# Altium PCB UTAT_data handling_v1.pc.PcbDoc (part 3 of 3)
Units mm, origin at the board's own origin, x right, y up, seen from the top; angles counter-clockwise.
Board outline 152.4 x 101.6 mm, 4 copper layers (Top Layer, +3V3, GND, Bottom Layer); 169 components, 207 nets, 755 pads, 446 vias.
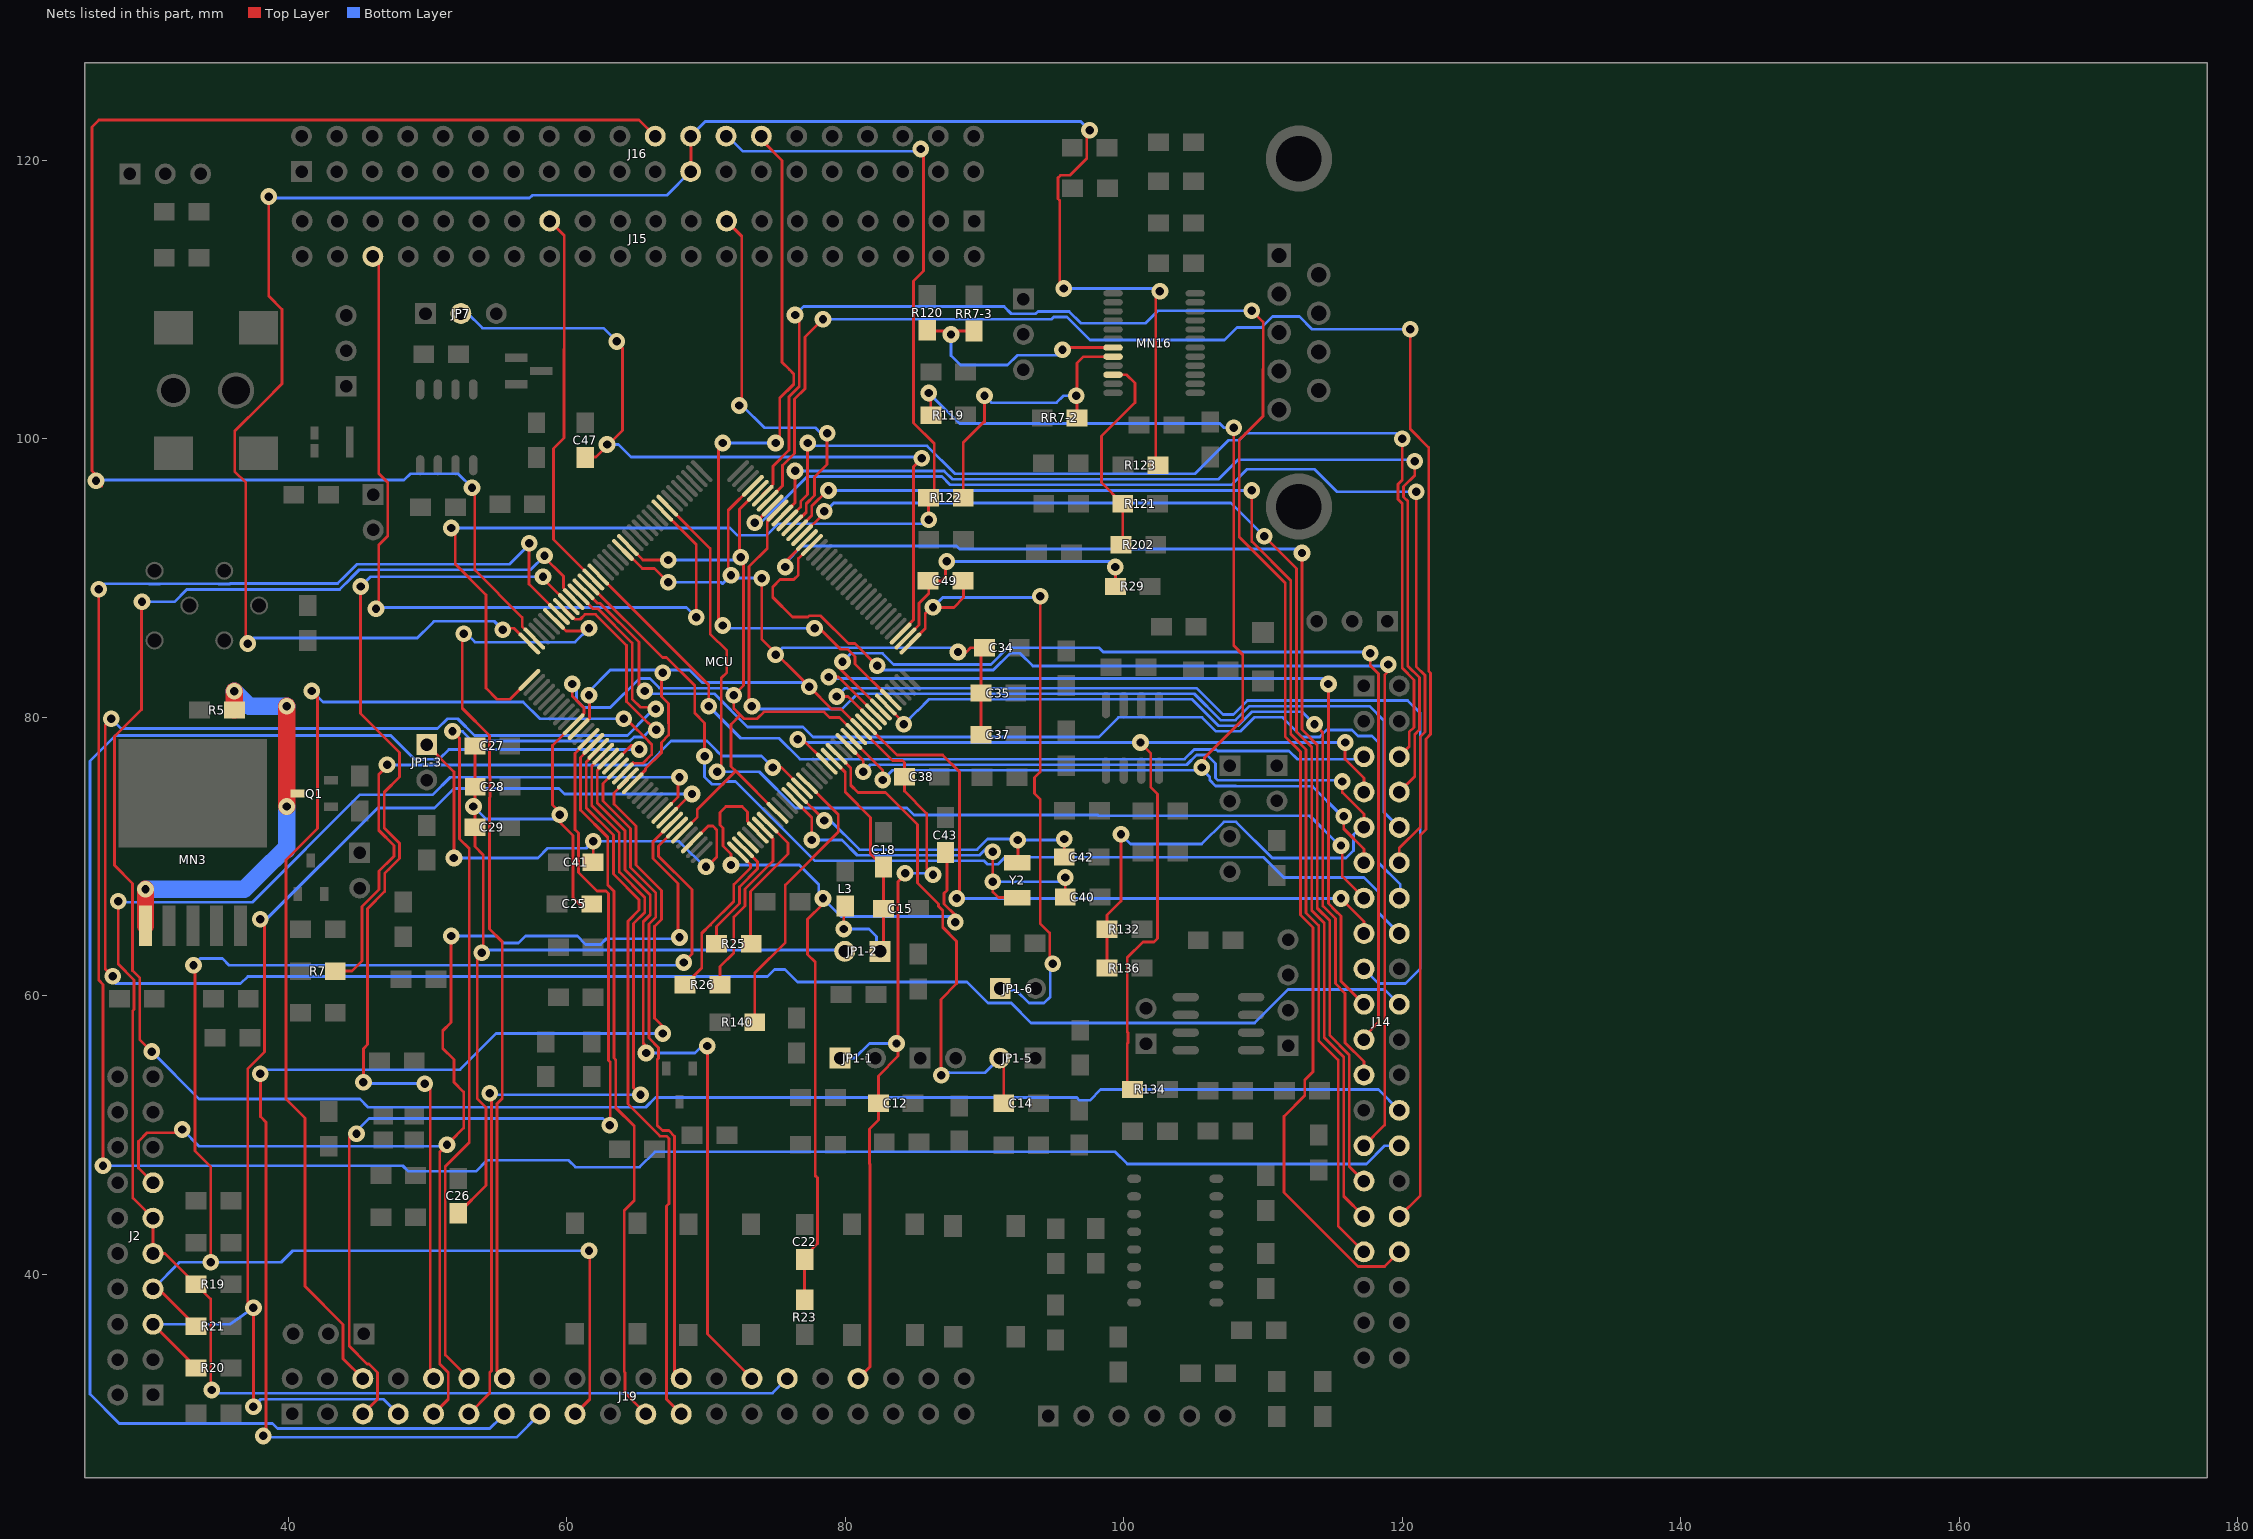
[diagram p5: the nets of this part, all layers, seen from the top]

## Via types
v1: diameter 1.2, hole 0.6, Top Layer to Bottom Layer, 446 vias

## Nets (pads, with @x,y where several pads share a name; then routed paths per layer and width w, separated by ;. In a path a pad name is that pad's centre, name@x,y a point inside that pad or via, vN(x,y) a via of type N, cw(c..) or ccw(c..) an arc to the next point about the centre after c; other vN are vias at no path point) (continued)
PB24: J16.22 MCU.143 | length 107.2
  Top Layer w0.2: v1(26.2,97) 26.2,97.4 25.9,97.7 25.9,122.4 26.4,122.9 65.2,122.9 J16.22@66.36,121.74 J16.22@66.38,121.74 ; v1@26.6,96.6 v1@26.6,97 ; v1@53.4,96.4 53.4,90.573 56.8,87.173 56.8,86.533 MCU.143@57.671,85.662
  Bottom Layer w0.2: v1(26.2,97) 26.25,97.05 48.323,97.05 48.773,97.5 52.2,97.5 v1(53.2,96.5)
PB25: J16.23 J16.24 MCU.144 R123.1 | length 151.8
  Top Layer w0.2: v1(37.1,85.3) 36.956,85.444 36.956,96.856 36.156,97.656 36.156,100.552 38.256,102.652 38.256,102.656 39.556,103.956 39.556,109.304 38.6,110.26 v1(38.6,117.4) ; v1(55.4,86.3) 55.5,86.4 56.226,86.4 MCU.144@57.317,85.308 ; J16.23@68.92,119.2 J16.24@68.92,121.74 ; v1(95.7,110.8) 95.4,111.1 95.4,117.132 95.281,117.251 95.281,118.749 95.457,118.925 96.124,118.925 97.35,120.151 97.35,121.649 97.174,121.825 97.174,122.074 v1@97.6,122.5 ; R123.1@102.381,98.23 102.3,98.311 102.3,110.3 v1(102.6,110.6)
  Bottom Layer w0.2: v1(37.1,85.3) 37.5,85.7 49.27,85.7 50.285,86.715 ; v1(38.6,117.4) 38.7,117.3 57.334,117.3 57.534,117.5 67.2,117.5 J16.23@68.9,119.2 ; 50.286,86.714 50.473,86.9 54.8,86.9 v1(55.4,86.3) ; J16.24@68.9,121.74 69.95,122.79 96.916,122.79 v1(97.55,122.156) ; J16.23@68.91,119.19 J16.23@68.92,119.2 ; v1(95.7,110.8) 102.4,110.8 v1(102.6,110.6)
PB26: J16.26 MCU.1 R122.1 | length 93.5
  Top Layer w0.2: v1(51.7,93.6) 52,93.3 52,91 54.2,88.8 54.2,82.1 55,81.3 55.926,81.3 MCU.1@57.317,82.692 ; v1@85.63,120.818 85.63,112.064 84.9,111.334 84.9,101.151 86.4,99.651 86.4,96.198 R122.1@85.978,95.776 v1@85.978,94.422
  Bottom Layer w0.2: v1(51.7,93.6) 71.727,93.6 72.252,93.075 74.348,93.075 75.173,93.9 85.7,93.9 v1(86,94.2) ; J16.26@71.46,121.74 71.56,121.74 72.65,120.65 85.262,120.65 v1(85.43,120.818)
PB27: J16.28 MCU.68 | length 55.5
  Top Layer w0.2: v1(71.2,86.6) 70.9,86.9 70.9,99.4 v1(71.2,99.7) ; J16.28@74.151,121.32 75.47,120.001 75.47,105.5 75.473,105.5 76,104.973 ; v1(75,99.7) 75.2,99.7 75.3,99.8 75.3,102.927 76.3,103.927 76.3,104.673 76,104.972 ; v1(77.8,86.4) 77.8,86.346 77.946,86.2 78.146,86.4 79.646,84.9 80.173,84.9 80.7,84.373 80.7,83.846 MCU.68@83.268,81.278
  Bottom Layer w0.2: v1(71.2,86.6) 71.4,86.4 v1(77.8,86.4) ; v1(71.2,99.7) 71,99.7 v1(75,99.7)
PB28: J2.9 J2.11 J19.30 MCU.28 R19.1 | length 127
  Top Layer w0.2: v1(27.8,66.8) 27.8,62.273 28.931,61.142 28.931,59.031 28.84,58.94 28.84,45.49 J2.11@30.29,44.04 J2.9@30.29,41.5 31.161,41.5 R19.1@33.381,39.28 34.431,38.23 34.431,31.769 v1(34.5,31.7) ; MCU.28@66.863,73.146 68,74.282 68,75.6 v1(68.1,75.7)
  Bottom Layer w0.2: v1@28.226,66.726 37.434,66.726 45.158,74.45 50.385,74.45 51.635,75.7 v1(68.1,75.7) ; v1(34.5,31.7) 34.73,31.47 74.791,31.47 J19.30@75.841,32.52
PB29: J2.5 J19.7 MCU.29 R20.1 | length 95.6
  Top Layer w0.2: J2.5@30.29,36.42 33.381,33.329 R20.1@33.381,33.28 ; v1@37.1,38 37.1,54.773 38.3,55.973 38.3,65.2 v1(38,65.5) ; v1(37.5,30.5) v1(37.5,37.6) ; MCU.29@67.217,72.792 v1@68.825,74.4
  Bottom Layer w0.2: J2.5@30.29,36.42 35.82,36.42 v1(37.5,37.6) ; v1(37.5,30.5) 38.03,31.03 46.851,31.03 J19.7@47.901,29.98 ; v1(38,65.5) 38.427,65.5 46.427,73.5 50.5,73.5 51.9,74.9 59.438,74.9 59.838,74.5 v1(69,74.5)
PB30: J2.13 J19.9 MCU.30 | length 89.9
  Top Layer w0.2: J2.13@30.29,46.58 29.24,47.63 29.24,49.555 29.855,50.17 32.17,50.17 v1(32.4,50.4) ; J19.9@50.441,29.98 51.491,31.03 51.491,32.955 50.884,33.562 50.884,48.784 51.7,49.6 52.6,50.5 52.6,53.1 51.9,53.8 51.9,55.427 51.1,56.227 51.1,57.5 51.7,58.1 v1(51.7,64.3) ; MCU.30@67.571,72.439 66.2,71.068 66.2,69.865 68,68.065 68,64.3 v1(68.1,64.2)
  Bottom Layer w0.2: v1(32.4,50.4) 33.6,49.2 51.3,49.2 v1(51.4,49.3) ; v1(51.7,64.3) 54.962,64.3 55.462,63.8 56.538,63.8 57.038,64.3 60.762,64.3 61.362,63.7 62.438,63.7 62.838,64.1 68,64.1 v1(68.1,64.2)
PB31: J2.7 J19.17 MCU.31 R21.1 | length 118.8
  Top Layer w0.2: J2.7@30.29,38.96 30.701,38.96 R21.1@33.381,36.28 ; v1(33.2,62.2) 33.3,62.1 33.3,48.866 34.431,47.735 v1(34.431,40.869) ; J19.17@60.601,29.98 61.651,31.03 61.651,41.649 v1(61.6,41.7) ; MCU.31@67.924,72.085 66.6,70.761 66.6,70.031 69,67.631 69,63 v1(68.4,62.4)
  Bottom Layer w0.2: J2.7@30.29,38.96 32.199,40.869 v1(34.431,40.869) 39.496,40.869 40.327,41.7 v1(61.6,41.7) ; v1(33.2,62.2) 33.68,62.68 35.279,62.68 35.759,62.2 68.7,62.2 68.9,62.4 v1(68.4,62.4)
PC0: J14.5 MCU.130 | length 62.7
  Top Layer w0.2: MCU.130@62.267,90.258 70.2,82.325 v1(70.2,80.8)
  Bottom Layer w0.2: v1(70.2,80.8) 72.5,78.5 75.245,78.5 76.745,77 104.362,77 105.062,77.7 106.637,77.7 106.757,77.58 110.116,77.58 110.126,77.59 111.874,77.59 112.464,77 117.07,77 J14.5@117.25,77.18 J14.5@116.801,77.629
PC1: J14.7 MCU.55 R134.1 | length 73.6
  Top Layer w0.2: v1(76.6,78.418) 76.6,78.446 76.754,78.6 MCU.55@78.672,76.681 ; R134.1@100.631,53.28 100.25,53.661 100.25,56.577 100.3,56.627 100.3,57.373 100.25,57.423 100.25,62.749 101.376,63.875 102.174,63.875 102.431,64.132 102.431,74.503 101.936,74.998 101.936,77.43 v1@101.1,78.266 ; v1(115.9,78.2) 115.9,77 117.25,75.65 J14.7@117.25,74.64
  Bottom Layer w0.2: v1(76.6,78.418) 76.6,78.3 76.7,78.2 v1(115.9,78.2)
  other v1: 101.2,78.2
PC2: J14.9 MCU.59 R132.1 R136.2 | length 73.8
  Top Layer w0.2: MCU.59@80.086,78.096 81.3,76.882 v1(81.3,76.1) ; R136.2@98.8,62 R132.1@98.8,64.8 98.8,65.801 99.8,66.801 v1(99.8,71.6) ; v1(115.7,75.4) 115.7,74.6 117.25,73.05 J14.9@117.25,72.1
  Bottom Layer w0.2: v1(81.3,76.1) 81.8,76.6 104.527,76.6 105.227,77.3 105.973,77.3 106.581,76.692 106.581,75.656 106.757,75.48 115.62,75.48 v1(115.7,75.4) ; v1(99.8,71.6) 100.5,70.9 105.596,70.9 107.196,72.5 108.066,72.5 110.666,69.9 115.973,69.9 116.5,70.427 116.5,71.6 117,72.1 J14.9@117.25,72.1
PC3: J14.11 MCU.60 R119.1 | length 92.7
  Top Layer w0.2: MCU.60@80.511,78.449 MCU.60@80.44,78.449 82.7,76.189 v1(82.7,75.5) ; v1(86,103.3) 86,102.8 86.15,102.65 R119.1@86.15,101.7 ; v1@105.8,76.7 105.8,77.1 108.55,79.85 108.55,84.499 107.9,85.149 v1(107.9,100.8) ; v1(115.8,72.9) 115.8,72 117.25,70.55 J14.11@117.25,69.56
  Bottom Layer w0.2: v1(82.7,75.5) 83.4,76.2 105.7,76.2 106.181,75.719 106.181,75.49 106.591,75.08 108.046,75.08 108.076,75.05 113.549,75.05 v1@115.659,72.94 ; v1(86,103.3) 88.2,101.1 106.893,101.1 107.193,100.8 v1(107.9,100.8)
  other v1: 105.6,76.4
PC4: J14.13 MCU.116 | length 72.9
  Top Layer w0.2: MCU.116@67.217,95.208 70.3,92.125 70.3,86 71.5,84.8 71.5,83.227 71.1,82.827 71.1,76.4 v1(70.8,76.1) ; v1@70.6,76 70.6,76.027 v1@70.736,76.163 ; v1(115.6,70.8) 115.7,70.7 115.7,68.57 J14.13@117.25,67.02
  Bottom Layer w0.2: v1(70.8,76.1) 73.827,76.1 76.427,73.5 84.439,73.5 84.938,73 98.14,73 98.2,72.94 113.36,72.94 115.5,70.8 v1(115.6,70.8)
PC5: J14.15 MCU.63 | length 48.1
  Top Layer w0.2: MCU.63@81.501,79.51 83.71,77.3 86.999,77.3 88.2,76.099 88.2,67.2 v1(88,67) ; v1(115.6,67) 117.25,65.35 J14.15@117.25,64.48
  Bottom Layer w0.2: v1(88,67) v1(115.6,67)
PC6: J14.17 MCU.64 | length 70.1
  Top Layer w0.2: v1(79.4,81.5) 80.2,81.5 80.209,81.509 MCU.64@81.854,79.863
  Bottom Layer w0.2: v1(79.4,81.5) 80,82.1 105.227,82.1 107.127,80.2 107.873,80.2 108.877,81.204 113.115,81.204 113.121,81.21 120.39,81.21 121.3,80.3 121.3,61.965 120.225,60.89 118.3,60.89 J14.17@117.25,61.94
PC7: J14.19 MCU.65 | length 64.8
  Top Layer w0.2: v1(78.827,82.9) 79.524,82.9 ; 79.525,82.9 MCU.65@82.208,80.217 ; 114.7,71.173 114.7,66.627 115.227,66.1 ; 114.7,71.173 v1(114.7,82.4) ; 115.228,66.1 115.6,65.728 115.6,61.05 J14.19@117.25,59.4
  Bottom Layer w0.2: v1(78.827,82.9) 78.927,82.8 114.3,82.8 114.6,82.5 v1@114.9,82.5
PC8: J14.21 MCU.66 | length 71.9
  Top Layer w0.2: v1@79.466,83.666 MCU.66@82.561,80.571 ; J14.21@117.25,56.86 117.25,57.06 118.3,58.11 118.3,83.134 117.7,83.734 v1(117.7,84.6)
  Bottom Layer w0.2: v1(79.8,84) 80.4,84.6 82.673,84.6 83.473,83.8 90.462,83.8 91.662,85 98.227,85 98.527,84.7 117.6,84.7 v1(117.7,84.6)
PC9: J14.23 MCU.67 | length 60.4
  Top Layer w0.2: MCU.67@82.915,80.924 v1@84.269,79.569 ; v1(113.7,79.5) 114.3,78.9 114.3,71.339 114.3,66.462 115.062,65.7 ; 115.063,65.7 115.2,65.563 115.2,60.884 115.9,60.184 115.9,56.631 117.25,55.281 J14.23@117.25,54.32
  Bottom Layer w0.2: v1(84.2,79.5) 85.2,80.5 85.227,80.5 86.027,81.3 104.896,81.3 106.796,79.4 108.204,79.4 109.208,80.404 112.796,80.404 v1(113.7,79.5)
PC10: J15.36 MCU.117 | length 58
  Top Layer w0.2: J15.36@46.08,113.024 46.5,112.604 46.5,97.524 47.15,96.874 47.15,93.025 46.5,92.375 46.5,88 v1(46.3,87.8) ; MCU.117@66.863,94.854 69.3,92.418 v1(69.3,87.2)
  Bottom Layer w0.2: v1(46.3,87.8) 46.4,87.9 57.1,87.9 68.6,87.9 v1(69.3,87.2)
PC11: J14.27 MCU.93 | length 87.8
  Top Layer w0.2: MCU.93@77.611,92.379 76.632,91.4 76.632,90.232 76.3,89.9 75.327,89.9 74.8,89.373 74.8,88.627 76.227,87.2 77.327,87.2 77.427,87.3 78.227,87.3 80.227,85.3 80.7,85.3 v1(82.3,83.7) ; J14.27@117.25,49.24 118.74,50.73 118.74,83.04 v1@119.1,83.4
  Bottom Layer w0.2: v1(82.3,83.7) 82.6,83.4 90.627,83.4 91.827,84.6 92.573,84.6 93.473,83.7 118.9,83.7 v1(119,83.8)
PC12: J14.29 MCU.94 | length 87.6
  Top Layer w0.2: v1(75.7,90.8) 75.7,91.175 MCU.94@77.258,92.733 ; v1@112.8,92.1 v1(112.8,91.8) 112.8,79.127 113.9,78.027 113.9,71.504 ; 113.9,71.504 113.9,66.296 114.8,65.396 114.8,57.166 116.2,55.766 116.2,47.75 J14.29@117.25,46.7
  Bottom Layer w0.2: v1@75.7,91.1 76.9,92.3 88,92.3 88.2,92.1 112.5,92.1 v1(112.8,91.8)
PC13: J14.31 MCU.95 | length 87
  Top Layer w0.2: MCU.95@76.904,93.086 78.5,94.682 v1(78.5,94.8) ; v1(110.1,93) 112.4,90.7 112.4,78.962 113.5,77.862 113.5,71.67 113.5,66.13 114.4,65.23 114.4,57 115.8,55.6 115.8,45.61 J14.31@117.25,44.16
  Bottom Layer w0.2: v1(78.5,94.8) 78.573,94.8 79.173,95.4 107.7,95.4 v1(110.1,93)
PC14: J14.33 MCU.96 | length 92.2
  Top Layer w0.2: MCU.96@76.551,93.44 77.6,94.489 77.6,95.173 78.727,96.3 v1(78.8,96.3) ; v1(109.2,96.3) 109.2,92.627 111.993,89.835 111.993,78.803 113.1,77.696 113.1,71.836 113.1,65.965 114,65.064 114,56.8 115.4,55.4 115.4,43.47 J14.33@117.25,41.62
  Bottom Layer w0.2: v1(78.8,96.3) v1(109.2,96.3)
PC15: J15.15 MCU.97 | length 28.6
  Top Layer w0.2: J15.15@71.48,115.64 72.57,114.55 72.57,102.57 v1(72.4,102.4) ; MCU.97@76.197,93.793 76.259,93.793 77.2,94.734 77.2,95.338 77.8,95.938 77.8,97.273 78.7,98.173 v1(78.7,100.4)
  Bottom Layer w0.2: v1(72.4,102.4) 72.6,102.4 74.2,100.8 77.873,100.8 78.273,100.4 v1(78.7,100.4)
PC16: J14.6 MCU.98 | length 75.1
  Top Layer w0.2: MCU.98@75.844,94.218 MCU.98@75.844,94.147 76.8,95.103 76.8,95.504 77.3,96.004 v1(77.3,99.7) ; J14.6@119.79,77.18 120.5,77.89 120.5,78.945 120.84,79.285 120.84,82.695 120,83.535 120,95.362 119.7,95.662 119.7,96.738 120,97.038 120,97.066 v1(120,100)
  Bottom Layer w0.2: v1(77.3,99.7) 77.5,99.5 79.073,99.5 85.873,99.5 87.873,97.5 105.127,97.5 107.527,99.9 108.273,99.9 108.773,100.4 119.6,100.4 v1(120,100)
PC17: J14.8 MCU.99 | length 74.3
  Top Layer w0.2: MCU.99@75.49,94.501 76.4,95.41 v1(76.4,97.7) ; J14.8@119.79,74.64 120.9,75.75 120.9,78.779 121.24,79.119 121.24,82.861 120.4,83.701 120.4,95.527 120.1,95.827 120.1,96.573 120.9,97.373 v1(120.9,98.4)
  Bottom Layer w0.2: v1(76.4,97.7) 87.107,97.7 87.707,97.1 106.8,97.1 108.2,98.5 120.64,98.5 120.9,98.24 v1(120.9,98.4)
PC18: J14.10 MCU.100 | length 70.7
  Top Layer w0.2: v1(73.3,80.8) 73.1,81 73.1,90.373 73.1,90.827 74.404,92.131 74.404,94.051 75.137,94.783 MCU.100@75.137,94.854
  Bottom Layer w0.2: v1(73.3,80.8) 73.5,80.6 79.773,80.6 80.873,81.7 105.062,81.7 106.962,79.8 108.038,79.8 109.042,80.804 117.651,80.804 118.7,79.755 118.7,73.19 J14.10@119.79,72.1
PC19: J14.12 MCU.101 | length 80.1
  Top Layer w0.2: v1(73.504,93.975) 73.504,93.928 MCU.101@74.783,95.208 ; J14.12@119.79,69.56 119.79,70.615 121.3,72.125 121.3,78.614 121.64,78.954 121.64,83.026 121,83.666 v1(121,96.2)
  Bottom Layer w0.2: v1@73.3,93.7 73.673,93.7 77.273,97.3 86.941,97.3 87.541,96.7 107.727,96.7 108.847,97.82 113.69,97.82 115.31,96.2 v1(121,96.2)
PC20: J15.25 MCU.131 | length 27.8
  Top Layer w0.2: J15.25@58.78,115.64 59.83,114.59 59.83,106.468 59.8,106.438 59.8,100.055 59.05,99.305 59.05,92.768 MCU.131@61.914,89.904 MCU.131@61.914,89.834
PC21: J14.16 MCU.132 | length 73.5
  Top Layer w0.2: MCU.132@61.56,89.551 61.619,89.551 66.87,84.3 67.173,84.3 69.2,82.273 69.2,80.3 69.9,79.6 v1(69.9,77.2)
  Bottom Layer w0.2: v1(69.9,77.2) 69.9,75.727 70.427,75.2 71.18,75.2 71.38,75.4 72.127,75.4 77.827,69.7 89.986,69.7 90.229,69.456 90.975,69.456 91.478,69.96 110.04,69.96 111.49,68.51 117.245,68.51 118.3,67.455 118.3,65.97 J14.16@119.79,64.48
PC22: J14.14 MCU.133 | length 77.7
  Top Layer w0.2: MCU.133@61.207,89.197 62.204,88.2 62.404,88.2 65.2,85.404 65.2,82.3 v1(65.6,81.9)
  Bottom Layer w0.2: v1(65.6,81.9) 65.8,81.7 69.827,81.7 70.6,81.7 72.982,79.318 76.973,79.318 77.691,78.6 98.219,78.6 99.623,80.004 105.626,80.004 106.63,79 108.37,79 109.374,80.004 111.396,80.004 112.8,78.6 114.073,78.6 114.573,79.1 116.385,79.1 116.815,78.67 117.83,78.67 118.3,78.2 118.3,69.565 119.865,68 119.865,67.095 J14.14@119.79,67.02
PC23: J14.20 MCU.134 | length 165.9
  Top Layer w0.2: v1(27.3,79.9) 26.865,79.465 26.865,61.935 v1(27.4,61.4) ; MCU.134@60.853,88.844 61.897,87.8 62.238,87.8 64.7,85.338 64.7,81.327 65.3,80.727 v1@66.173,80.727
  Bottom Layer w0.2: v1(27.3,79.9) 28,79.2 50.727,79.2 51.427,79.9 52.173,79.9 53.373,78.7 64.361,78.7 65.894,80.233 ; v1@27.62,60.88 36.58,60.88 37.1,61.4 74.427,61.4 74.927,61.9 75.673,61.9 76.573,61 88.737,61 90.257,59.48 91.92,59.48 93.35,58.05 109.405,58.05 111.805,60.45 118.74,60.45 J14.20@119.79,59.4
  other v1: 66.4,80.6
PC24: J14.26 MCU.135 | length 161.2
  Top Layer w0.2: v1(29.5,88.3) 29.456,88.256 29.456,80.556 27.522,78.622 27.522,69.378 28.827,68.073 28.827,61.811 29.331,61.307 29.331,56.869 v1(30.2,56) ; v1(58.4,91.6) 58.3,91.6 59.767,90.133 59.767,89.294 60.499,88.561 MCU.135@60.499,88.49
  Bottom Layer w0.2: v1(29.5,88.3) 31.832,88.3 32.712,89.18 43.694,89.18 44.495,89.981 44.495,89.995 45.1,90.6 56.424,90.6 57.4,90.6 v1(58.4,91.6) ; v1(30.2,56) 33.6,52.6 45.141,52.6 45.741,52 63.638,52 65.673,52 66.373,52.7 66.727,52.7 68.373,52.7 96.627,52.7 96.827,52.5 97.573,52.5 98.343,53.27 118.3,53.27 J14.26@119.79,51.78
PC25: J19.10 MCU.136 | length 80.9
  Top Layer w0.2: v1(45.2,89.4) 45.2,80.273 48,77.473 48,75.727 46.9,74.627 46.9,72.061 48,70.961 48,69.861 47.238,69.1 47.225,69.1 46.925,68.8 46.925,67.483 45.7,66.258 45.7,56.501 45.4,56.201 v1(45.4,53.8) ; v1(49.8,53.7) 49.875,53.7 50.2,53.375 50.2,32.52 J19.10@50.441,32.52 ; v1@58.2,89.8 58.3,89.7 58.582,89.7 MCU.136@60.146,88.137
  Bottom Layer w0.2: v1(45.2,89.4) 45.9,90.1 v1(58.3,90.1) ; v1(45.4,53.8) 45.5,53.7 v1(49.8,53.7)
PC26: J19.12 MCU.137 | length 76.9
  Top Layer w0.2: v1(51.8,79) 52.3,78.5 52.3,71.273 53,70.573 53,49.478 51.284,47.762 51.284,34.217 J19.12@52.981,32.52 ; MCU.137@59.792,87.783 59.863,87.783 60.596,87.05 60.969,87.05 61.319,87.4 62.072,87.4 64.3,85.173 64.3,81.127 65.827,79.6 65.861,79.6 v1@66.661,78.8 ; v1@66.423,79.038 v1(66.423,79.1)
  Bottom Layer w0.2: v1(51.8,79) 52.507,79 53.207,78.3 64.527,78.3 64.827,78.6 65.493,78.6 65.993,79.1 v1(66.423,79.1)
PC27: J14.28 MCU.138 | length 175.6
  Top Layer w0.2: v1@26.2,89.4 v1(26.4,89.2) 26.4,80.373 26.4,61.127 26.7,60.827 v1(26.7,47.8) ; v1(57.3,92.5) 57.3,89.568 MCU.138@59.439,87.429
  Bottom Layer w0.2: v1@26.34,47.9 v1@26.7,47.9 ; v1(26.4,89.2) 26.8,89.6 29.993,89.6 30.013,89.58 30.8,89.58 30.82,89.6 34.993,89.6 35.013,89.58 35.8,89.58 35.825,89.605 43.553,89.605 44.095,90.147 44.095,90.161 44.934,91 55.9,91 57.3,92.4 v1(57.3,92.5) ; v1(26.7,47.8) 48.227,47.8 48.627,47.4 53.473,47.4 54.273,48.2 60.127,48.2 60.627,47.7 65.227,47.7 66.327,48.8 99.389,48.8 100.258,47.931 117.426,47.931 118.735,49.24 J14.28@119.79,49.24
PC28: J19.14 MCU.139 | length 67.7
  Top Layer w0.2: v1(52.6,86) 52.5,85.9 52.5,80.659 54.463,78.696 54.463,75.795 54.483,75.775 54.483,74.277 54.463,74.257 54.463,64.799 55.371,63.891 55.371,52.627 55,52.256 55,33.041 J19.14@55.521,32.52 ; MCU.139@59.085,87.076 59.961,86.2 61.4,86.2 v1(61.6,86.4)
  Bottom Layer w0.2: v1(52.6,86) 52.8,86 53.4,85.4 60.6,85.4 v1(61.6,86.4)
PC29: J14.32 MCU.102 | length 123.9
  Top Layer w0.2: MCU.102@74.429,95.561 75.5,96.632 75.5,98.1 76.361,98.961 76.361,102.857 77.104,103.6 77.104,107.304 v1(78.4,108.6) ; J14.32@119.79,44.16 121.3,45.67 121.3,71.559 121.7,71.959 121.7,78.448 122.04,78.788 122.04,83.192 121.9,83.332 121.9,99.373 120.575,100.698 v1(120.575,107.875)
  Bottom Layer w0.2: v1(78.4,108.6) 78.41,108.59 94.809,108.59 94.974,108.755 95.918,108.755 97.573,107.1 107.227,107.1 108.127,108 109.906,108 110.686,108.78 112.621,108.78 113.526,107.875 v1(120.575,107.875)
PC30: J14.34 MCU.103 | length 126.6
  Top Layer w0.2: MCU.103@74.076,95.915 74.076,95.985 74.809,96.718 74.809,98.036 75.961,99.188 75.961,103.023 76.7,103.761 76.7,108.6 v1(76.4,108.9) ; v1(109.2,109.2) 110.015,108.385 110.015,105.015 110,105 110,101.627 108.3,99.927 108.3,92.962 111.593,89.669 111.593,78.638 112.7,77.53 112.7,72.001 112.7,65.799 113.6,64.899 113.6,54.549 113,53.949 113,52.851 111.5,51.351 111.5,45.885 116.815,40.57 118.74,40.57 J14.34@119.79,41.62
  Bottom Layer w0.2: v1(76.4,108.9) 77,109.5 91.416,109.5 91.926,108.99 93.674,108.99 93.839,109.155 96.083,109.155 96.938,108.3 101.573,108.3 102.473,109.2 v1(109.2,109.2)
PD0: J19.5 MCU.13 | length 70.4
  Top Layer w0.2: v1(44.9,50.1) 44.7,50.1 44.381,49.781 44.381,34.856 45.667,33.57 45.796,33.57 46.411,32.955 46.411,31.03 J19.5@45.361,29.98 ; MCU.13@61.56,78.449 61.56,78.378 60.6,77.418 60.6,71.938 60.85,71.688 60.85,68.851 62.176,67.525 62.824,67.525 63,67.349 63,55.365 63.125,55.24 63.125,50.725 v1(63.1,50.7)
  Bottom Layer w0.2: v1(44.9,50.1) 44.9,50.3 45.8,51.2 62.6,51.2 v1(63.1,50.7)
PD1: J19.21 MCU.14 | length 51
  Top Layer w0.2: MCU.14@61.914,78.096 61.914,78.025 61,77.111 61,73.338 62.95,71.388 62.95,67.965 63.4,67.515 63.4,55.531 63.525,55.406 63.525,51.971 64.85,50.646 64.85,45.298 64.131,44.579 64.131,33.015 64.191,32.955 64.191,31.47 J19.21@65.681,29.98
PD2: J19.23 MCU.15 | length 52
  Top Layer w0.2: MCU.15@62.267,77.742 62.267,77.671 61.4,76.804 61.4,73.504 63.35,71.554 63.35,68.755 65.2,66.905 65.2,66.16 64.4,65.359 64.4,52.227 66.702,49.925 67.174,49.925 67.35,49.749 67.35,45.077 67.171,44.898 67.171,31.03 J19.23@68.221,29.98
PD3: J19.11 MCU.16 | length 61.6
  Top Layer w0.2: J19.11@52.981,29.98 54.471,31.47 54.471,32.955 54.6,33.084 54.6,52.871 v1(54.471,53) ; MCU.16@62.621,77.389 62.621,77.318 61.8,76.497 61.8,73.67 63.777,71.693 63.777,68.894 65.6,67.071 65.6,65.994 64.8,65.194 64.8,56.027 64.8,53.4 v1(65.3,52.9)
  Bottom Layer w0.2: v1(54.471,53) 54.571,52.9 v1(65.3,52.9)
PD4: J19.28 MCU.17 | length 53
  Top Layer w0.2: MCU.17@62.974,77.035 62.974,76.964 62.2,76.19 62.2,73.835 64.177,71.858 64.177,69.059 66,67.236 66,65.828 65.5,65.328 65.5,56.6 65.7,56.4 v1(65.7,55.9) ; v1(70.1,56.4) 70.109,56.391 70.109,35.712 J19.28@73.301,32.52
  Bottom Layer w0.2: v1(65.7,55.9) 69.2,55.9 v1@69.9,56.6
PD5: J19.13 MCU.18 | length 120.3
  Top Layer w0.2: MCU.18@63.328,76.681 64.646,78 v1@65.2,78
  Bottom Layer w0.2: J19.13@55.521,29.98 55.241,29.7 54.471,28.93 53.416,28.93 39.231,28.93 38.861,29.3 27.87,29.3 25.77,31.4 25.77,76.87 27.6,78.7 47.366,78.7 49.076,76.99 50.824,76.99 51.534,77.7 v1(65.2,77.7)
PD6: J19.24 MCU.19 | length 47.4
  Top Layer w0.2: MCU.19@63.681,76.328 62.6,75.246 62.6,74.001 64.577,72.024 64.577,69.225 66.4,67.402 66.4,65.662 65.9,65.162 65.9,56.973 66.6,56.273 66.6,55.527 66.5,55.427 66.5,50.7 66.875,50.325 67.34,50.325 67.75,49.915 67.75,32.991 J19.24@68.221,32.52
PD7: J19.6 MCU.20 | length 83.1
  Top Layer w0.2: v1(41.7,81.9) 42.1,81.5 42.1,72.027 39.831,69.758 39.831,52.607 41.2,51.238 41.2,39.147 43.941,36.406 43.941,33.94 J19.6@45.361,32.52 ; MCU.20@64.035,75.974 64.106,75.974 64.106,76.116 64.758,76.768 64.829,76.698 64.839,76.707 65.48,76.707 66.1,77.327 66.1,78.073 65.573,78.6 64.7,79.473 64.273,79.9 v1(64.1,79.9)
  Bottom Layer w0.2: v1(41.7,81.9) 42.5,81.1 56.873,81.1 58.073,79.9 64.5,79.9 v1(64.1,79.9)
PD8: J19.15 MCU.21 | length 96.7
  Top Layer w0.2: v1(38,54.4) 38,51.327 38.401,50.926 38.401,28.601 v1(38.2,28.4) ; MCU.21@64.389,75.621 64.389,75.55 63.4,74.562 63.4,73.767 64.977,72.19 64.977,69.391 66.8,67.568 66.8,65.497 66.3,64.997 66.3,58.4 v1@67.145,57.555
  Bottom Layer w0.2: v1(38,54.4) 38.3,54.7 52.334,54.7 54.934,57.3 v1(66.9,57.3) ; 38.8,28.3 56.381,28.3 J19.15@58.061,29.98
PD9: C12.1 C34.1 C35.1 C37.1 C38.1 J19.34 JP1-1.1 MCU.11 MCU.22 MCU.62 MCU.105 MCU.125 | length 139.6
  Top Layer w0.2: MCU.11@60.853,79.156 61.632,79.936 61.632,81.567 v1(61.6,81.6) ; MCU.125@64.035,92.026 64.106,92.026 65.431,90.7 66.3,90.7 v1(67.3,89.7) ; MCU.22@64.742,75.267 64.742,75.304 65.638,76.2 65.665,76.227 65.665,76.327 66.8,77.462 66.8,78.204 67.323,78.727 67.323,79.55 67.3,79.573 67.3,81 66.8,81.5 66.8,83.1 v1(66.9,83.2) ; v1@71.6,90.7 71.6,94.873 73.349,96.622 MCU.105@73.369,96.622 ; v1(74,90) 74,85.627 v1(77.427,82.2) 79.027,80.6 79.703,80.6 MCU.62@81.147,79.156 83.403,76.9 84.1,76.9 84.25,76.75 C38.1@84.25,75.75 84.25,74.7 85.85,73.1 85.85,69.15 v1(86.3,68.7) ; J19.34@80.921,32.52 81.771,33.37 81.771,47.915 81.75,47.936 81.75,50.448 82.381,51.079 C12.1@82.381,52.28 82.381,54.255 83.8,55.674 83.8,68.2 v1@84.2,68.6 ; v1(88.1,84.7) 88.7,84.7 89,85 89.75,85 C35.1@89.75,81.75 C37.1@89.75,78.75
  Bottom Layer w0.2: v1(61.6,81.6) 61.6,81.873 63.127,83.4 66.8,83.4 68.827,83.4 69.727,82.5 77.127,82.5 v1(77.427,82.2) ; v1(67.3,89.7) 71.1,89.7 71.2,89.6 v1(71.8,90.2) ; v1@72.1,90 v1(74,90) ; v1(75,84.5) 75.5,85 87.6,85 88,84.6 v1(88.1,84.7) ; JP1-1.1@79.631,55.53 80.686,55.53 81.736,56.58 v1(83.68,56.58) ; v1(84.3,68.8) 86.2,68.8 v1(86.3,68.7)
PD10: C25.1 C26.1 C27.1 C28.1 C29.1 JP1-2.2 MCU.10 MCU.32 MCU.45 MCU.61 MCU.104 MCU.124 | length 148.8
  Top Layer w0.2: C26.1@52.209,44.388 54.2,46.379 54.2,51.998 53.571,52.627 53.571,62.771 v1(53.9,63.1) ; C27.1@53.413,77.947 C29.1@53.413,72.105 53.413,70.725 54,70.138 54,63.4 v1@53.7,63.1 ; v1@59.4,72.573 60.45,71.523 60.45,67.05 60.9,66.6 C25.1@61.95,66.6 ; v1@59.4,73.3 58.983,73.717 58.983,77.993 MCU.10@60.499,79.51 61.2,80.21 61.2,80.281 61.232,80.281 61.232,80.695 60.4,81.527 v1(60.4,82.4) ; MCU.124@64.389,92.379 65.468,91.3 v1(67.3,91.3) ; MCU.32@68.278,71.732 69.38,72.834 69.38,73.4 72.08,76.1 72.182,76.1 ; 72.727,79.9 72.463,80.163 ; 72.727,79.9 73.673,79.9 74.173,80.4 78.473,80.4 78.873,80 79.596,80 MCU.61@80.793,78.803 ; MCU.104@73.722,96.268 72.4,94.946 72.4,91.6 v1(72.5,91.5) 72.7,91.3 72.7,82.3 v1(72,81.6) 72,80.627 72.463,80.163 ; MCU.45@75.137,73.146 72.182,76.1 ; 72.182,76.1 71.8,76.482 71.8,79.5 72.463,80.163
  Bottom Layer w0.2: v1(53.3,73.6) 54.2,72.7 v1@59.1,72.7 ; v1@54,63.3 79.6,63.3 JP1-2.2@79.7,63.2 ; v1@60.7,81.973 60.7,81.227 61.227,80.7 63.127,80.7 65.227,82.8 65.973,82.8 66.673,82.1 69.661,82.1 ; v1(67.3,91.3) 72.3,91.3 v1(72.5,91.5) ; 69.662,82.1 71.5,82.1 v1(72,81.6)
  other v1: 59.5,73
PN1: C41.1 JP1-3.1 MCU.34 | length 37.6
  Top Layer w0.2: JP1-3.1@49.95,78.04 51.9,76.09 v1(51.9,69.9) ; C41.1@61.8,69.6 C41.1@61.9,69.6 v1(61.9,71.1) ; MCU.34@68.985,71.025 70.16,72.2 70.5,72.2 70.778,71.922 70.778,69.978 69.882,69.082 69.964,69 v1@70.4,69.436 ; v1(70,69.282) v1@70.246,69.282
  Bottom Layer w0.2: v1(51.9,69.9) 57.927,69.9 58.627,70.6 61.4,70.6 v1(61.9,71.1) 68.062,71.1 70.062,69.1 70.044,69.082 70.126,69 70.4,69.274 70.392,69.282 v1(70,69.282)
PR6: MCU.51 R140.2 | length 20.6
  Top Layer w0.2: R140.2@73.5,58.1 73.5,61.635 75.7,63.835 75.7,67.966 79.5,71.766 79.5,73.025 MCU.51@77.258,75.267
PT1: MCU.37 R26.1 | length 11.8
  Top Layer w0.2: R26.1@68.505,60.814 69.7,62.009 69.7,64.5 70.3,65.1 70.35,65.1 70.35,65.15 72,66.8 72,67.996 73.195,69.191 73.195,69.431 MCU.37@72.308,70.317
PT2: MCU.38 R25.1 | length 8.6
  Top Layer w0.2: R25.1@70.75,63.75 70.75,64.984 72.4,66.634 72.4,67.831 73.7,69.131 73.7,69.633 MCU.38@72.662,70.671
PT3: C22.1 C43.1 MCU.41 R23.2 | length 61.6
  Top Layer w0.2: v1(71.8,69.4) 71.8,70.189 71.222,70.767 71.222,72.044 71,72.266 71,73.173 71.427,73.6 72.6,73.6 72.99,73.21 72.99,72.535 73.722,71.802 MCU.41@73.722,71.732 ; R23.2@77.081,38.18 C22.1@77.081,41.08 77.081,41.281 78.006,42.206 78.006,46 78,46.006 78,46.935 77.85,47.085 77.85,62.423 77.3,62.973 77.3,65.501 78.4,66.601 v1(78.4,67) ; C43.1@86.891,70.144 87.3,69.735 87.3,67.573 87.1,67.373 87.1,66.6 87.9,65.8 v1(87.9,65.3)
  Bottom Layer w0.2: v1(71.8,69.4) 76.7,69.4 78.1,68 78.1,67.3 v1(78.4,67) 79.7,65.7 87.6,65.7 v1@87.8,65.5
PT5: MCU.50 R7.2 | length 49.9
  Top Layer w0.2: R7.2@43.381,61.78 44.58,61.78 45.3,62.5 45.3,66.424 46.525,67.649 46.525,68.966 47.059,69.5 47.073,69.5 47.6,70.027 47.6,70.796 46.5,71.896 46.5,75.9 47.1,76.5 v1(47.1,76.6) ; v1(74.8,76.4) 75.418,76.4 MCU.50@76.904,74.914
  Bottom Layer w0.2: v1(47.1,76.6) 47.11,76.59 65.79,76.59 67.5,78.3 70.073,78.3 70.8,77.573 70.8,77.564 71.145,77.22 73.98,77.22 v1(74.8,76.4)
PT14: C49.1 JP1-6.1 MCU.73 | length 48.8
  Top Layer w0.2: MCU.73@84.683,85.308 85.741,86.367 85.741,87.441 86.2,87.9 87.8,87.9 88.5,88.6 C49.1@88.5,89.75 ; v1(94,88.7) 94,76.073 93.6,75.673 93.6,74.527 94,74.128 94,65.21 94.681,64.529 94.681,62.519 v1(94.9,62.3)
  Bottom Layer w0.2: v1(86.3,87.9) 87,88.6 93.9,88.6 v1(94,88.7) ; JP1-6.1@91.131,60.53 91.261,60.4 92.28,60.4 93.2,59.48 94.28,59.48 94.721,59.921 94.721,62.121 v1(94.9,62.3)
PU1: MCU.42 R26.2 | length 13.2
  Top Layer w0.2: R26.2@71.005,60.814 71.005,62.105 72,63.1 72,65.669 72.8,66.469 72.8,67.665 74.809,69.674 74.809,71.282 74.076,72.015 MCU.42@74.076,72.085
PU2: MCU.43 R25.2 | length 10.4
  Top Layer w0.2: R25.2@73.25,63.75 73.2,63.8 73.2,67.499 75.9,70.199 75.9,70.968 MCU.43@74.429,72.439
PU4: MCU.39
PU5: C40.1 MCU.48 Y2.1 | length 28.8
  Top Layer w0.2: MCU.48@76.197,74.207 77.6,72.804 v1(77.6,71.2) ; v1(90.602,70.356) 90.602,67.454 91,67.056 Y2.1@92.352,67.056 ; C40.1@95.8,67.1 v1@95.8,68.3
  Bottom Layer w0.2: v1(77.6,71.2) 79.762,71.2 80.862,70.1 89.638,70.1 90.248,70.71 v1(90.602,70.356) ; v1(90.6,68.2) 95.5,68.2 v1(95.8,68.5)
PU6: C42.1 MCU.49 Y2.2 | length 24.2
  Top Layer w0.2: MCU.49@76.551,74.56 78.5,72.611 v1(78.5,72.6) ; Y2.2@92.352,69.556 92.4,69.604 v1(92.4,71.2) ; C42.1@95.731,69.972 v1(95.731,71.269)
  Bottom Layer w0.2: v1(78.5,72.6) 78.927,72.6 81.027,70.5 89.473,70.5 90.229,71.256 92.344,71.256 v1(92.4,71.2) 95.662,71.2 v1(95.731,71.269)
PU7: C15.1 C18.1 JP1-2.1 L3.1 MCU.56 | length 21.1
  Top Layer w0.2: MCU.56@79.026,77.035 80,76.061 80,74.638 81.825,72.813 81.825,70.2 82.75,69.275 C18.1@82.75,69.25 C15.1@82.75,66.25 82.75,63.45 JP1-2.1@82.5,63.2 ; v1(79.9,64.8) 79.9,65.75 80.3,66.15 L3.1@80,66.45
  Bottom Layer w0.2: v1@79.8,64.8 81.7,64.8 82.24,64.26 JP1-2.1@82.24,63.2
PU8: C14.1 JP1-5.2 MCU.57 | length 36.4
  Top Layer w0.2: MCU.57@79.379,77.389 80.4,76.368 80.4,75.127 80.927,74.6 82.9,74.6 85.2,72.3 85.2,68.1 86.7,66.6 86.7,66.434 87,66.134 87,64.927 88,63.927 88,60.879 86.871,59.75 86.871,54.329 v1(86.9,54.3) ; JP1-5.2@91.091,55.53 91.381,55.24 C14.1@91.381,52.28
  Bottom Layer w0.2: v1(86.9,54.3) 87.266,54.3 87.466,54.5 87.486,54.48 90.041,54.48 JP1-5.2@91.091,55.53
PU14: C49.2 MCU.74 R29.2 | length 21.3
  Top Layer w0.2: MCU.74@84.329,85.662 85.3,86.633 85.3,88.2 86,88.9 C49.2@86,89.75 ; C49.2@85.95,89.8 86.9,89.8 87.2,90.1 v1@87.2,91 ; R29.2@99.4,89 R29.2@99.4,89.4 v1(99.4,90.8) v1@99.4,91
  Bottom Layer w0.2: v1(87.3,91.2) 99,91.2 v1(99.4,90.8)
PU15: C47.1 JP7.2 MCU.75 | length 58.3
  Top Layer w0.2: C47.1@61.331,98.655 61.376,98.7 62.1,98.7 64,100.6 64,106.52 v1@63.3,107.22 ; MCU.75@83.975,86.015 83.975,86.086 84.9,87.011 84.9,98 v1(85.5,98.6)
  Bottom Layer w0.2: JP7.2@52.821,109.08 53.951,107.95 62.65,107.95 v1(63.6,107) ; v1(62.9,99.6) 63.727,99.6 64.627,98.7 65.373,98.7 85.4,98.7 v1(85.5,98.6)
"PWR CN": MN3.1 Q1.3 R5.2 | length 29.8
  Top Layer w1.25: MN3.1@29.752,65.03 v1(29.752,67.651) ; R5.2@36.131,80.53 v1(36.131,81.869) ; v1(39.9,73.6) v1(39.9,80.8)
  Bottom Layer w1.25: v1(29.752,67.651) 36.843,67.651 38.103,68.911 38.112,68.911 39.701,70.5 39.9,70.5 v1(39.9,73.6) ; v1(36.131,81.869) 37.2,80.8 v1(39.9,80.8)
RTS0: MN16.8 R122.2 RR7-2.2 | length 21.7
  Top Layer w0.2: R122.2@88.478,95.776 88.478,99.729 89.949,101.2 90,101.2 v1(90,103.1) ; RR7-2.2@96.65,101.5 96.65,105.45 97.105,105.905 MN16.8@99.235,105.905
  Bottom Layer w0.2: v1(90,103.1) 90.5,102.6 95.173,102.6 95.673,103.1 v1(96.6,103.1)
RXD0: MN16.10 R121.2 R202.1 | length 15
  Top Layer w0.2: MN16.10@99.235,104.605 100.195,104.605 100.8,104 100.8,102.6 98.4,100.2 98.4,96.862 R121.2@99.932,95.33 R202.1@99.932,92.409
TXD0: MN16.7 R120.2 RR7-3.2 | length 17.2
  Top Layer w0.2: R120.2@85.9,107.8 85.95,107.75 87.75,107.75 RR7-3.2@89.25,107.75 ; v1@95.645,106.555 MN16.7@99.235,106.555
  Bottom Layer w0.2: v1(87.6,107.5) 87.6,105.977 88.277,105.3 91.655,105.3 92.365,106.01 95.21,106.01 v1(95.6,106.4)
pads on no net: D6.3 J1. J1.2 J13.1 J13.4 J13.6 J13.9 J14.18 J14.22 J14.24 J14.30 J14.35 J14.36 J15.23 J15.29 J15.30 J15.31 J15.32 J15.33 J15.35 J16.5 J16.12 J16.13 J16.25 J16.30 J16.32 J16.34 J16.36 J19.27 MN14.7 MN14.8 MN14.9 MN16.12 Y1.5

## Polygon pours and split planes (outlines as drawn)
+3V3 on +3V3 (split plane): 177.29,25.91 25.91,25.91 25.91,126.49 177.29,126.49
P7 on GND (split plane): 177.29,25.91 25.91,25.91 25.91,126.49 177.29,126.49

## Silkscreen, mask and mechanical layers (free items; w line width, h text height)
Top Overlay:
  lines w0.2: 25.4,27.5 122.4,27.5 122.4,123.215 25.4,123.215 25.4,27.5

## Text inside footprints (layer, text, board x,y; h text height)
J2: Top Overlay "20" at 28.258,55.724 h1.27 r90; Top Overlay "19" at 30.798,55.724 h1.27 r90; Top Overlay "1" at 30.798,28.8 h1.27 r90; Top Overlay "2" at 28.258,28.8 h1.27 r90
J13: Top Overlay "6" at 117.105,112.29 h1 r270; Top Overlay "9" at 117.105,103.98 h1 r270; Top Overlay "5" at 107.705,102.595 h1 r270; Top Overlay "1" at 107.705,113.425 h1 r270
J14: Top Overlay "1" at 116.742,84.8 h1.27 r270; Top Overlay "2" at 119.282,84.8 h1.27 r270; Top Overlay "40" at 119.282,31.968 h1.27 r270; Top Overlay "39" at 116.742,31.968 h1.27 r270
J15: Top Overlay "39" at 38.968,116.148 h1.27 r180; Top Overlay "40" at 38.968,113.608 h1.27 r180; Top Overlay "2" at 91.8,113.608 h1.27 r180; Top Overlay "1" at 91.8,116.148 h1.27 r180
J16: Top Overlay "39" at 91.252,118.692 h1.27; Top Overlay "40" at 91.252,121.232 h1.27; Top Overlay "2" at 38.42,121.232 h1.27; Top Overlay "1" at 38.42,118.692 h1.27
J19: Top Overlay "39" at 90.573,29.472 h1.27; Top Overlay "40" at 90.573,32.012 h1.27; Top Overlay "2" at 37.741,32.012 h1.27; Top Overlay "1" at 37.741,29.472 h1.27